# Altium PCB AdControl.PcbDoc
Units mil, origin at the board's own origin, x right, y up, seen from the top; angles counter-clockwise.
Board outline 3761.89 x 1911.49 mil, 2 copper layers (Top Layer, Bottom Layer); 53 components, 35 nets, 221 pads, 67 vias.
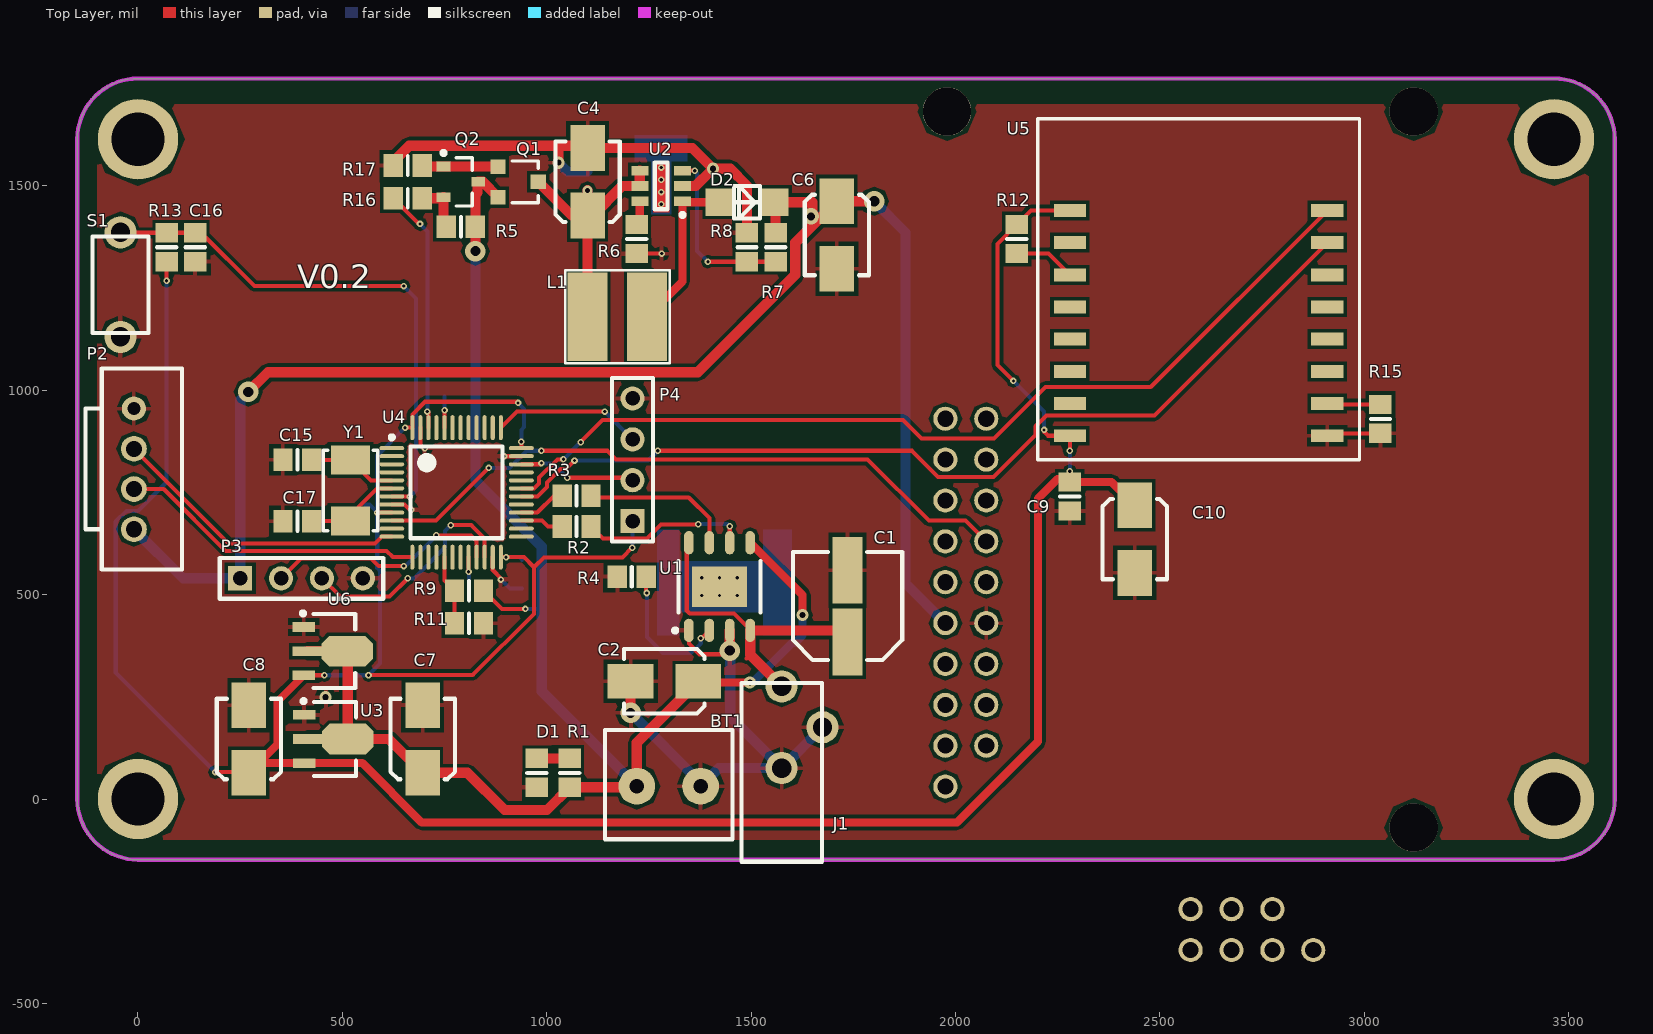
[diagram p0: Top Layer view]
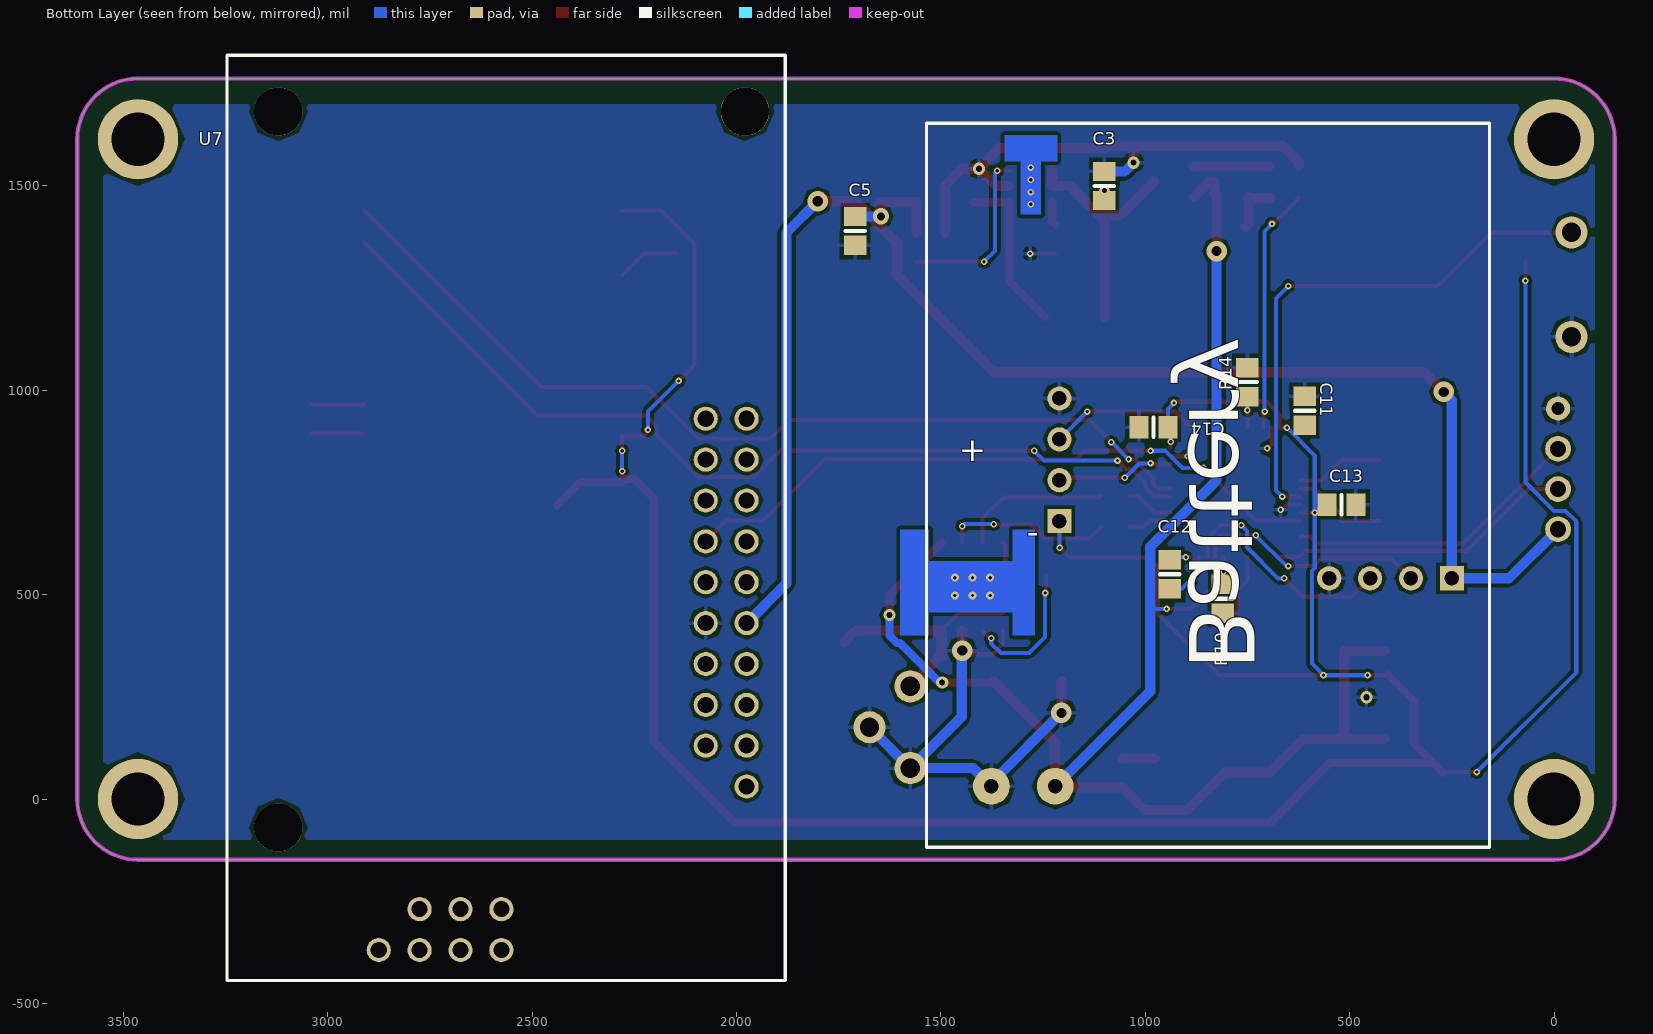
[diagram p1: Bottom Layer view, seen from below]

## Layer stack, top to bottom
Top Solder: solder mask 0.4, Solder Resist, Dk 3.5
Top Layer: signal copper 1.4
Dielectric 1: dielectric 12.6, FR-4, Dk 4.8
Bottom Layer: signal copper 1.4
Bottom Solder: solder mask 0.4, Solder Resist, Dk 3.5

## Board outline
0,-148.66 cw(c0,0) -148.66,0 -148.66,1614.17 cw(c0,1614.17) 0,1762.83 3464.57,1762.83 cw(c3464.57,1614.17) 3613.23,1614.17 3613.23,0 cw(c3464.57,0) 3464.57,-148.66

## Design rules (kind name [scope] priority, off if disabled: settings)
Clearance [All] p1: gap=8
MinimumSolderMaskSliver [All] p1: minsoldermaskwidth=0
PolygonConnect [All] p1: connectstyle=Relief reliefconductorwidth=10 reliefentries=4 polygonreliefangle="90 Angle" airgapwidth=10
RoutingVias [All] p1: holewidth=8 width=8 viastyle="Through Hole" minholewidth=8 minwidth=15 maxholewidth=100 maxwidth=1000
SilkToSilkClearance [All] p1: silktosilkclearance=0
SilkToSolderMaskClearance [IsPad] p1: minsilkscreentomaskgap=0 clearancetoexposedcopper=TRUE
SolderMaskExpansion [All] p1: expansion=4
UnpouredPolygon [All] p1: allowunpoured=FALSE
Width [All] p1: maxlimit=1000 minlimit=8 preferedwidth=8
26 further rules are at their usual default settings.

## Components (designator, comment, footprint, x,y, rotation, side; value= is the part's Value field where it differs from the comment)
BT1 "Battery" KF3.96_2P 1220.47,31.37 r90 top
C1 "Cap Pol1" CAP_6.3*5.4MM 1736,472 r90 top
C2 "Cap Pol1" Cap_5*4mm 1288,288 r180 top
C3 "Cap Semi" 6-0805_N 1100,1500 r90 bottom
C4 "Cap Pol1" Cap_5*4mm 1100,1510 r90 top
C5 "Cap Semi" 6-0805_N 1710,1390 r270 bottom
C6 "Cap Pol1" Cap_5*4mm 1710,1380 r270 top
C7 "Cap Pol1" Cap_5*4mm 696.38,146.81 r90 top
C8 "Cap Pol1" Cap_5*4mm 271.38,146.81 r90 top
C9 "Cap Semi" 6-0805_N 2280,740 r270 top
C10 "Cap Pol1" Cap_5*4mm 2439,636 r270 top
C11 "Cap Semi" 6-0805_N 610,950 r90 bottom
C12 "Cap Semi" 6-0805_N 940,550 r270 bottom
C13 "Cap Semi" 6-0805_N 520,720 r180 bottom
C14 "Cap Semi" 6-0805_N 980,910 r0 bottom
C15 "Cap Semi" 6-0805_N 390,830 r180 top
C16 "Cap Semi" 6-0805_N 140,1350 r90 top
C17 "Cap Semi" 6-0805_N 390,680 r180 top
D1 "PWR" 6-0805_N 976,64 r270 top
D2 "Diode US1M" US1M 1490,1460 r0 top
J1 "PWR2.5" KLD-3.5-1.3mm 1574.8,275.59 r90 top
L1 "Inductor Iron CD54" CD54_Inductor 1100,1180 r0 top
P2 "HIM" XH2.54-4P -10,660 r90 top
P3 "UART_Debug_Port" HDR1X4 250,540 r0 top
P4 "Debug_Port" HDR1X4 1210,680 r90 top
Q1 "AO3400" AO-SOT23-3_V 930,1510 r270 top
Q2 "S8550" SOT-23B_L 790,1510 r0 top
R1 "Res3" 6-0805_N 1056,64 r90 top
R2 "Res3" 6-0805_N 1073.11,666.73 r180 top
R3 "Res3" 6-0805_N 1073.11,741.73 r180 top
R4 "Res3" 6-0805_N 1208,544 r180 top
R5 "Res3" 6-0805_N 790,1400 r0 top
R6 "Res3" 6-0805_N 1220,1370 r270 top
R7 "Res3" 6-0805_N 1560,1350 r270 top
R8 "Res3" 6-0805_N 1490,1350 r90 top
R9 "Res3" 6-0805_N 810,510 r180 top
R10 "Res3" 6-0805_N 810,490 r270 bottom
R11 "Res3" 6-0805_N 810,430 r0 top
R12 "Res3" 6-0805_N 2150,1370 r90 top
R13 "Res3" 6-0805_N 70,1350 r90 top
R14 "Res3" 6-0805_N 750,1020 r90 bottom
R15 "Res3" 6-0805_N 3040,930 r270 top
R16 "Res3" 6-0805_N 660,1470 r0 top
R17 "Res3" 6-0805_N 660,1550 r180 top
S1 "Reset" SWP_PB_6.5mm -42.8,1130.64 r90 top
U1 "TP4056" Power_SOP8 1422.8,519.81 r90 top
U2 "FP6291" SOT23-6L 1280,1500 r180 top
U3 "HT7333-SOT89" SOT89_N 481.81,146.81 r0 top
U4 "STM32F103C8T6" STM-LQFP48_L 779.4,750.09 r0 top
U5 "ESP-07" ESP-07_Wifi 2280,1440 r0 top
U6 "HT7333-SOT89" SOT89_N 480.38,361.81 r0 top
U7 "MH-Z14A" MH-Z14A 1881,-444 r90 bottom
Y1 "XTAL" OSC_5032_2Pin 520,680 r90 top

## Footprints (in the part's own frame and the unit in brackets; to place one, negate y for a bottom-side part, rotate by r counter-clockwise, add the part's x,y. Pads: shape width x height; smd on the part's side, far side on the other; paste and mask are expansions set on the pad)
6-0805_N [mm] "Chip Resistor, Body 2.0x1.2mm, IPC Medium Density"
  rect 1.2x1.4 smd: 1(-0.9,0) 2(0.9,0)
  silkscreen extent 0,-0.6 0,0.6, body extent -1.07,-0.7 1.07,0.7, height 0.7
AO-SOT23-3_V [mm] "SOT23, 3-Leads, Body 3.016x2.8mm, Pitch 0.95mm"
  rect 0.9x0.95 smd: 1(-0.95,-1.25) 2(0.95,-1.25) 3(0,1.25)
  silkscreen extent -1.3,-0.38 1.3,1.25, body extent -1.14,-1.25 1.17,1.36, height 1.25
Cap_5*4mm [mm]
  rect 2.85x2.15 smd: 1(-2.1,0) 2(2.1,0)
  silkscreen extent -2.5,-2 2.5,2, body extent -2.5,-2 2.5,2, height 6
CAP_6.3*5.4MM [mm] "Aluminum Electrolytic Capacitor, Body 6.50x6.60x5.40mm, IPC Low Density"
  rect 4.15x1.85 smd: 1(-2.225,0) 2(2.225,0)
  silkscreen extent -3.35,-3.4 3.35,3.4, body extent -3.35,-3.4 3.35,3.4, height 5.4
CD54_Inductor [mm] "CD54 Inductor"
  rect 2.5x5.5 smd: 1(0,0) 2(3.7,0)
  silkscreen extent -1.4,-2.9 5.1,2.9
ESP-07_Wifi [mm]
  rect 2x0.8 smd: 1(0,0) 2(0,-2) 3(0,-4) 4(0,-6) 5(0,-8) 6(0,-10) 7(0,-12) 8(0,-14) 9(16,-14) 10(16,-12) 11(16,-10) 12(16,-8) 13(16,-6) 14(16,-4) 15(16,-2) 16(16,0)
  silkscreen extent -2,-15.5 18,5.7
HDR1X4 [mm] "Connector; Header; 4 Position"
  rect 1.5x1.5 hole 0.9: 1(0,0)
  round 1.5 hole 0.9: 2(2.54,0) 3(5.08,0) 4(7.62,0)
  silkscreen extent -1.27,-1.27 8.89,1.27
KF3.96_2P [mil]
  round 90 hole 35.43: 1(0,0) 2(0,-155.91)
  silkscreen extent -130,-234 138,78
KLD-3.5-1.3mm [mm]
  round 2 hole 1.2: 1(0,0) 2(-5.08,0) 3(-2.54,-2.54)
  silkscreen extent -10.9,-2.5 0.2,2.5
MH-Z14A [mm] "CO2 Detector"
  round 3 hole 3: 0(9.5,31.5) 0(54,2.5) 0(54,31.5)
  round 1.5 hole 1: 1(22.21,2.4) 2(22.21,4.94) 3(24.75,2.4) 4(24.75,4.94) 5(27.29,2.4) 6(27.29,4.94) 7(29.83,2.4) 8(29.83,4.94) 9(32.37,2.4) 10(32.37,4.94) 11(34.91,2.4) 12(34.91,4.94) 13(14.59,4.94) 14(17.13,4.94) 15(19.67,4.94) 16(19.67,2.4) 17(17.13,2.4) 18(14.59,2.4) 19(12.05,2.4) 20(1.89,25.26) 21(1.89,22.72) 22(1.89,20.18) 23(1.89,17.64) 24(4.43,17.64) 25(4.43,20.18) 26(4.43,22.72)
  silkscreen extent 0,0 57.5,34.7
OSC_5032_2Pin [mm]
  rect 1.8x2.4 smd: 1(0,0) 2(3.8,0)
  silkscreen extent -0.6,-1.7 4.4,1.7
Power_SOP8 [mm] "SOP, 8-Leads, Body 4.90x3.90mm, Pitch 1.27mm, Thermal Pad 3.41x2.52mm, IPC Medium Density"
  oval 1.45x0.6 smd: 1(-2.725,1.905) 2(-2.725,0.635) 3(-2.725,-0.635) 4(-2.725,-1.905) 5(2.725,-1.905) 6(2.725,-0.635) 7(2.725,0.635) 8(2.725,1.905)
  rect 2.52x3.41 smd: 9(0,0)
  Bottom Layer region: -1.6,-2.7 1.6,-2.7 1.6,2.5 -1.6,2.5
  silkscreen extent -2.85,-2.55 1.6,2.88, body extent -2,-2.55 2,2.55, height 1.75
SOT23-6L [mm] "SOT23, 6-Leads, Body 2.90x2.80mm, Pitch 0.95mm, IPC Medium Density"
  rect 1.05x0.6 smd: 1(-1.325,0.95) 2(-1.325,0) 3(-1.325,-0.95) 4(1.325,-0.95) 5(1.325,0) 6(1.325,0.95)
  silkscreen extent -1.45,-1.45 0.4,1.92, body extent -0.8,-1.45 0.8,1.45, height 1.45
SOT89_N [mm] "SOT89, 3-Leads, Body 4.5x2.4 mm, Pitch 1.5mm, Lead Span 4.1mm, IPC Medium Density"
  rect 1.4x0.6 smd: 1(-1.9,1.5) 3(-1.9,-1.5)
  rect 1.8x0.6 smd: 2(-1.7,0)
  oct 3.2x1.9 smd: 2(0.8,0)
  silkscreen extent -2.07,-2.3 1.3,2.47, body extent -1.3,-2.3 1.29,2.3, height 1.6
SOT-23B_L [mm] "SOT23, 3-Leads, Body 2.9x1.3mm, Pitch 0.95mm, Lead Span 2.4mm, IPC High Density"
  rect 0.85x0.6 smd: 1(-1.075,0.95) 2(-1.075,-0.95) 3(1.075,0)
  silkscreen extent -1.2,-1.5 0.7,1.92, body extent -0.7,-1.5 0.7,1.5, height 1.14
STM-LQFP48_L [mm] "QFP, 48-Leads, Body 7x7mm, Pitch 0.5mm, IPC High Density"
  oval 1.55x0.25 smd: 1(-4.025,2.75) 2(-4.025,2.25) 3(-4.025,1.75) 4(-4.025,1.25) 5(-4.025,0.75) 6(-4.025,0.25) 7(-4.025,-0.25) 8(-4.025,-0.75) 9(-4.025,-1.25) 10(-4.025,-1.75) 11(-4.025,-2.25) 12(-4.025,-2.75) 25(4.025,-2.75) 26(4.025,-2.25) 27(4.025,-1.75) 28(4.025,-1.25) 29(4.025,-0.75) 30(4.025,-0.25) 31(4.025,0.25) 32(4.025,0.75) 33(4.025,1.25) 34(4.025,1.75) 35(4.025,2.25) 36(4.025,2.75)
  oval 0.25x1.55 smd: 13(-2.75,-4.025) 14(-2.25,-4.025) 15(-1.75,-4.025) 16(-1.25,-4.025) 17(-0.75,-4.025) 18(-0.25,-4.025) 19(0.25,-4.025) 20(0.75,-4.025) 21(1.25,-4.025) 22(1.75,-4.025) 23(2.25,-4.025) 24(2.75,-4.025) 37(2.75,4.025) 38(2.25,4.025) 39(1.75,4.025) 40(1.25,4.025) 41(0.75,4.025) 42(0.25,4.025) 43(-0.25,4.025) 44(-0.75,4.025) 45(-1.25,4.025) 46(-1.75,4.025) 47(-2.25,4.025) 48(-2.75,4.025)
  silkscreen extent -4.15,-2.85 2.85,3.55, body extent -3.5,-3.5 3.5,3.5, height 1.6
SWP_PB_6.5mm [mm]
  round 2 hole 1.2: 1(0,0) 2(6.5,0)
  silkscreen extent 0.25,-1.75 6.25,1.75
US1M [mm]
  rect 1.7x1.7 smd: 1(-1.74,0) 2(1.74,0)
  silkscreen extent -0.8,-1 0.8,1
XH2.54-4P [mm]
  round 1.6 hole 1: 1(0,0) 2(2.5,0) 3(5,0)
  round 1.5 hole 0.8: 4(7.5,0)
  silkscreen extent -2.5,-3 10,3

## Part data
BT1: "Multicell Battery"
C1 C2 C4 C6 C7 C8 C10: "Polarized Capacitor (Radial)"
C3 C5 C9 C11 C12 C13 C14 C15 C16 C17: "Capacitor (Semiconductor SIM Model)"
D1: library part LED0, "Typical INFRARED GaAs LED"
D2: library part "Diode BAT17", "Silicon RF Schottky Diode for Mixer Applications in the VHF/UHF Range"
J1: "Low Voltage Power Supply Connector"
L1: library part "Inductor Iron", "Magnetic-Core Inductor"
P2: library part XH2.54-4P
P3 P4: library part "Header 4", "Header, 4-Pin"
Q1: library part CMP-0278-00001-1, "N-channel Enhancement Mode Field-Effect Transistor; 5.8A/30V"
Q2: library part PNP, "PNP Bipolar Transistor"
R1 R2 R3 R4 R5 R6 R7 R8 R9 R10 R11 R12 R13 R14 R15 R16 R17: "Resistor"
S1: library part SW-PB, "Switch"
U3 U6: library part CMP-0204-00157-1, "Low Power Consumption LDO, Output Voltage 3.3V, SOT89 Pkg"
U4: library part CMP-0237-00215-3, "ARM Cortex-M3 32-bit MCU, 64 KB Flash, 20 KB Internal RAM, 37 I/Os, 48-pin LQFP, -40 to 85 degC, Tray"
U5: library part ESP-07_Wifi
U7: "CO2 Detector"
Y1: "Crystal Oscillator"

## Free pads (board coordinates)
  round 196.85 hole 129.92: 0(0,0) 0(0,1614.17) 0(3464.57,0) 0(3464.57,1614.17)

## Via types
v1: diameter 16, hole 8, Top Layer to Bottom Layer, tented both sides, 49 vias
v2: diameter 19.68, hole 7.87, Top Layer to Bottom Layer, tented both sides, 6 vias
v3: diameter 30, hole 15, Top Layer to Bottom Layer, tented both sides, 5 vias
v4: diameter 50, hole 25, Top Layer to Bottom Layer, tented both sides, 5 vias
v5: diameter 40, hole 20, Top Layer to Bottom Layer, tented both sides, 1 vias
v6: diameter 24, hole 12, Top Layer to Bottom Layer, tented both sides, 1 vias

## Nets (pads, with @x,y where several pads share a name; then routed paths per layer and width w, separated by ;. In a path a pad name is that pad's centre, name@x,y a point inside that pad or via, vN(x,y) a via of type N, cw(c..) or ccw(c..) an arc to the next point about the centre after c; other vN are vias at no path point)
+3.3V: C8.1 C9.1 C10.1 C11.1 C12.1 C13.1 C14.1 P4.1 R12.2 R13.1 U3.3 U4.9 U4.24 U4.36 U4.48 U5.1 U5.8 U6.3 | length 7972.2
  Top Layer w10: v1(70,1268) R13.1 ; v1(189,66) 269.51,66 C8.1 ; U6.3 v1(456.24,302.76) ; v1(564,303) 819,303 969,453 969,567 ; v1(585.44,700.87) U4.9 ; v1(653.55,908.55) U4.48 671.13,941.13 702,972 927,972 v1(930,969) ; U4.24 v1(900.62,591.62) 944.38,591.62 969,567 ; U4.36 v1(937.87,874.13) ; v1(1209,615) 1185,591 993,591 969,567 ; v1(2142,1023) 2103,1062 2103,1358.43 R12.2 2184.57,1440 U5.1 ; v1(2217,903) 2217,898.64 2226.82,888.82 U5.8 v1(2280,852) ; C9.1@2280,782.68 v1(2280,802.24)
  Top Layer w20: C8.1 C8.1@295,87.76 ; U6.3 342,239.18 342,134.76 C8.1@295,87.76 ; C9.1 2382.24,775.43 C10.1 ; C9.1@2280,782.68 2249.68,782.68 2202,735 2202,141 2003.5,-57.5 694.13,-57.5 548.87,87.76 U3.3 C8.1@295,87.76
  Bottom Layer w10: v1(70,1268) 70,775 -0.5,704.5 -28.43,704.5 -54.5,678.43 -54.5,309.5 v1(189,66) ; v1(456.24,302.76) 563.76,302.76 v1(564,303) 592.53,331.53 592.53,557.62 585.44,564.7 v1(585.44,700.87) ; C13.1 566.32,720 v1(585.44,700.87) ; v1(653.55,908.55) 585.44,840.44 v1(585.44,700.87) ; v1(900.62,591.62) 933.81,591.62 C12.1 ; v1(930,969) 944.57,954.43 C14.1 937.87,903.3 v1(937.87,874.13) ; v1(1209,615) 1210,616 P4.1 ; v1(2142,1023) 2217,948 v1(2217,903) ; v1(2280,802.24) v1(2280,852)
+5V: C5.1 C6.1 D2.2 P2.1 P3.1 R7.1 U7.1 | length 3912.9
  Top Layer w25: v4(270,996) 318,1044 1369.61,1044 1608.06,1282.45 1608.06,1360.74 C6.1 v4(1801.32,1462.68) ; D2.2 1650,1460 1650,1428.87 v5(1646.57,1425.43) ; R7.1 D2.2@1560,1458.5
  Bottom Layer w25: P2.1 110,540 P3.1 250,976 v4(270,996) ; v5(1646.57,1425.43) C5.1 ; v4(1801.32,1462.68) 1878,1386 1878,527.9 U7.1
+5V_IN: C1.1 J1.1 U1.4 U1.8 | length 776
  Top Layer w10: U1.8 1342.68,621.97 1342.68,461.39 1350,454.07 1458.08,454.07 1497.8,414.35 U1.4 ; 1488.54,343.32 1497.8,352.59
  Top Layer w25: J1.1 1497.8,352.59 U1.4 1707.87,412.53 C1.1
C\H\R\G\: R3.2 U4.28 | length 116.7
  Top Layer w10: U4.28 976.87,700.87 1017.73,741.73 R3.2
CO2PWM: U4.10 U7.6 | length 1617.1
  Top Layer w10: U4.10 729.19,681.19 v1(858,810) ; v1(987,852) 1149,852 1170,831 1785,831 1935,681 2024.9,681 U7.6
  Bottom Layer w10: v1(858,810) 909,810 951,852 v1(987,852)
DEBUG_RX: P3.3 U4.22 | length 571.9
  Top Layer w10: P3.3 495,495 615,495 v1(660,540) ; v1(765,670) 815.31,670 848.3,637.01 U4.22
  Bottom Layer w10: v1(660,540) 675,540 751,616 751,656 v1(765,670)
DEBUG_TX: P3.2 U4.21 | length 583.2
  Top Layer w10: P3.2 399,589 570,589 589,570 v1(650,570) ; v1(730,645) 814.86,645 828.61,631.24 U4.21
  Bottom Layer w10: v1(650,570) 655,570 v1(730,645)
FP6291EN: R16.1 U4.46 | length 598.5
  Top Layer w10: R16.1 687.57,1407 v1(690,1407) ; v1(708,948) 710.5,945.5 U4.46
  Bottom Layer w10: v1(690,1407) 708,1389 v1(708,948)
GND: BT1.2 C1.2 C2.2 C3.2 C4.2 C5.2 C6.2 C7.2 C8.2 C9.2 C10.2 C11.2 C12.2 C13.2 C14.2 C15.2 C16.1 C17.2 D1.2 J1.2 J1.3 P2.4 P3.4 P4.4 R4.2 R6.2 R8.2 R10.2 R11.2 R14.2 R15.2 R17.2 S1.1 U1.1 U1.3 U2.2 U3.1 U4.8 U4.23 U4.35 U4.47 U5.9 U6.1 U7.2 | length 2946.6
  Top Layer w10: U4.8 652.19,720.56 664.75,708 v1(669,708) ; U4.47 690.82,866.18 699,858 v1(702,858) ; U4.23 867.98,560.02 888,540 v1(888,537) ; v1(895.67,838.67) U4.35 ; R6.2 v1(1281.43,1334.57) ; U1.1 1347.8,380.2 1373.92,354.08 v4@1449.69,354.08 ; U5.9@2915.67,894.57 R15.2
  Top Layer w25: R17.2 624.57,1559.31 663.32,1598.06 1094.62,1598.06 C4.2 1356.32,1592.68 1404,1545 1404,1539 1365,1500 U2.2 ; v3(1029,1557) 1029,1595.06 ; v4(1205.32,210.68) C2.2 ; v3(1407,1542) 1449,1542 1490,1501 R8.2 ; U1.3 1447.8,355.97 v4@1449.69,354.08
  Bottom Layer w10: v1(888,537) 910.43,514.57 C12.2
  Bottom Layer w25: v3(1029,1557) 1050.57,1535.43 C3.2 ; v4(1205.32,210.68) 1376.38,39.62 BT1.2 1420.6,75.59 J1.2 ; v4(1447.8,363) 1449,361.8 1449,201.39 J1.2 ; J1.3 J1.2
  other v3: 459,249
HIMRXD: P2.3 U4.12 | length 733.9
  Top Layer w10: P2.3 221.85,625 580,625 596.82,641.82 U4.12
HIMTXD: P2.2 U4.13 | length 750.2
  Top Layer w10: P2.2 62.97,758.43 214.39,607 608,607 623.38,591.62 U4.13
NetC3_1: C3.1 C4.1 L1.1 Q1.3 U2.4 U2.5 | length 672.1
  Top Layer w25: Q1.3 1061.89,1427.32 C4.1 ; L1.1 C4.1 ; v6(1100,1489.31) C4.1 ; C4.1@1112.32,1427.32 1185,1500 U2.5 U2.4
  Bottom Layer w25: C3.1 v6(1100,1489.31)
NetC15_1: C15.1 U4.5 Y1.2 | length 215.8
  Top Layer w10: C15.1@425.83,829.61 Y1.2 569.99,779.61 U4.5
NetC16_2: C16.2 R13.2 S1.2 U4.7 | length 1325.1
  Top Layer w10: S1.2 -41.69,1385.43 R13.2 C16.2 154.57,1385.43 285,1255 v1(650,1255) ; U4.7 664.76,740.24 v1(665,740)
  Bottom Layer w10: v1(650,1255) 680,1225 680,755 v1(665,740)
NetC17_1: C17.1 U4.6 Y1.1 | length 237.4
  Top Layer w10: C17.1 Y1.1 520,695 584.93,759.93 U4.6
NetD1_1: D1.1 R1.2 | length 80
  Top Layer w25: D1.1 R1.2
NetD2_1: D2.1 L1.2 U2.1 | length 408.8
  Top Layer w20: L1.2 1332.17,1266.5 U2.1 1334.76,1460 D2.1
NetQ1_1: Q1.1 Q2.1 R17.1 | length 182.8
  Top Layer w25: R17.1@698.03,1547.4 Q2.1 Q1.1
NetQ2_2: Q2.2 R5.1 R16.2 | length 128.8
  Top Layer w25: R16.2 745.08,1470 Q2.2 747.68,1406.89 R5.1
NetR2_1: R2.1 U1.6 | length 408.6
  Top Layer w10: R2.1 1137.8,637.47 1244.91,637.47 1279.44,672 v1(1371,672) ; U1.6 v1(1447.8,667.2)
  Bottom Layer w10: v1(1371,672) 1372,673 1442,673 v1(1447.8,667.2)
NetR3_1: R3.1 U1.7 | length 372
  Top Layer w10: R3.1 1112.8,737.47 1347.53,737.47 1397.8,687.2 U1.7
NetR4_1: R4.1 U1.2 | length 347.6
  Top Layer w10: R4.1 1243.43,505.57 v1(1245,504) ; v1(1377,393) 1378.28,393 U1.2
  Bottom Layer w10: v1(1245,504) 1245,396 1284,357 1353,357 1377,381 v1(1377,393)
NetR6_1: R6.1 U2.6 | length 60.4
  Top Layer w20: R6.1 1227.83,1413.27 U2.6
NetR7_2: R7.2 R8.1 U2.3 | length 431.7
  Top Layer w10: U2.3 v1(1362,1537.4) ; v1(1394.43,1314.57) R8.1 R7.2
  Bottom Layer w10: v1(1362,1537.4) 1368,1531.4 1368,1341 v1(1394.43,1314.57)
NetR9_2: R9.2 R11.1 U4.17 | length 171.8
  Top Layer w10: U4.17 749.87,534.69 R9.2 R11.1
NetR10_1: R10.1 U4.20 | length 66.6
  Top Layer w10: v1(808.93,556.07) U4.20
  Bottom Layer w10: v1(808.93,556.07) 810,555 R10.1
NetR12_1: R12.1 U5.3 | length 151.6
  Top Layer w10: R12.1 2227.95,1334.57 U5.3
NetR14_1: R14.1 U4.44 | length 76.1
  Top Layer w10: U4.44 749.87,950.87 v1(750,951)
  Bottom Layer w10: v1(750,951) R14.1
NetR15_1: R15.1 U5.10 | length 131
  Top Layer w10: U5.10 2912.05,965.43 R15.1
S\T\D\B\Y\: R2.2 U4.27 | length 105.8
  Top Layer w10: U4.27 988.81,681.19 1003.27,666.73 R2.2
SWCLK: P4.3 U4.37 | length 366.8
  Top Layer w10: U4.37 927.12,948 v1(1142,948)
  Bottom Layer w10: v1(1142,948) P4.3
SWDIO: P4.2 U4.34 | length 290.8
  Top Layer w10: U4.34 983.98,818.98 v1(987,822) ; v1(1050,786) 1204,786 P4.2
  Bottom Layer w10: v1(987,822) 987.77,821.23 1014.77,821.23 v1(1050,786)
VB+: BT1.1 C2.1 C7.1 Q1.2 Q2.3 R1.1 R5.2 R9.1 U1.5 U3.2 U6.2 | length 3983.3
  Top Layer w10: R9.1 890.43,465 v1(948,465)
  Top Layer w20: C2.1 1373.68,285 v3(1497,285) ; U1.5 1626,498.9 v3(1626,450)
  Top Layer w25: U6.2@413.45,361.81 511.87,361.81 513.31,360.38 U3.2@513.31,146.81 ; U3.2@414.88,146.81 U3.2@513.31,146.81 ; v4(825.43,1340.57) R5.2 825.43,1478.57 831,1484.13 Q2.3@831,1508.68 ; Q2.3 843.39,1510 Q1.2 ; BT1.1@1217.67,28.57 R1.1 1056,28.39 1000.61,-27 897,-27 805.87,64.13 C7.1 613.7,146.81 U3.2@513.31,146.81 ; BT1.1 1220.47,137.8 C2.1
  Bottom Layer w10: v1(948,465) 988.06,465
  Bottom Layer w20: v3(1497,285) 1503.08,285 1600.08,382 1607.46,382 1626,400.54 v3(1626,450)
  Bottom Layer w25: v4(825.43,1340.57) 825.43,780.17 988.06,617.55 988.06,465 988.06,263.78 BT1.1
WIFI_RX: U4.30 U5.15 | length 2301.2
  Top Layer w10: U4.30 977.49,740.24 1001.06,763.81 1001.06,774.68 1033.38,807 1047,807 v1(1068,828) ; v1(1272,852) 1893.75,852 1957.87,787.88 2093.1,787.88 2196,890.78 2196,912 2222.81,938.81 2487.47,938.81 U5.15
  Bottom Layer w10: v1(1068,828) 1248,828 v1(1272,852)
WIFI_TX: U4.31 U5.16 | length 2299.3
  Top Layer w10: U4.31 969.12,759.93 981.38,772.19 981.38,786.38 1026,831 v1(1041,831) ; v1(1083,873) 1137,927 1872,927 1917,882 2094,882 2220,1008 2477.92,1008 U5.16
  Bottom Layer w10: v1(1041,831) v1(1083,873)
pads on no net: U1.9 U4.1 U4.2 U4.3 U4.4 U4.11 U4.14 U4.15 U4.16 U4.18 U4.19 U4.25 U4.26 U4.29 U4.32 U4.33 U4.38 U4.39 U4.40 U4.41 U4.42 U4.43 U4.45 U5.2 U5.4 U5.5 U5.6 U5.7 U5.11 U5.12 U5.13 U5.14 U7.0 U7.3 U7.4 U7.5 U7.7 U7.8 U7.9 U7.10 U7.11 U7.12 U7.13 U7.14 U7.15 U7.16 U7.17 U7.18 U7.19 U7.20 U7.21 U7.22 U7.23 U7.24 U7.25 U7.26
copper on no net:
  other v1: 1280,1455 1280,1485 1280,1515 1280,1545
  other v2: 1379.5,498.16 1422.8,498.16 1466.11,498.16 1379.5,541.46 1422.8,541.46 1466.11,541.46

## Polygon pours and split planes (outlines as drawn)
GND on Top Layer "TGND" (solid, remove dead copper, pour order 4): -50,-100 -100,-50 -100,1650 -50,1700 3500,1700 3550,1650 3550,-50 3500,-100
GND on Bottom Layer "BGND" (solid, remove dead copper, pour order 3): -50,-100 -100,-50 -100,1650 -50,1700 3500,1700 3550,1650 3550,-50 3500,-100

## Keep-outs
Keep-Out Layer:
  the board outline again, w10

## Other copper
Top Layer:
  rectangle: 1260,1435 1300,1555
Bottom Layer:
  rectangle: 1215,1560 1345,1625
  rectangle: 1255,1430 1305,1560
  rectangle: 1270,400 1324.37,660
  rectangle: 1529.1,400 1600,660

## Silkscreen, mask and mechanical layers (free items; w line width, h text height)
Top Overlay:
  text "V0.2" at 390,1230 h100
Bottom Overlay:
  lines w7.87: 157.48,-118.11 1535.43,-118.11 1535.43,1653.54 157.48,1653.54 157.48,-118.11
  text "+" at 1388.85,806.55 h100
  text "-" at 1260.85,606.55 h100
  text "Battery" at 944.88,314.96 h275.59 r90